# Altium PCB team throttle control draft 2.PcbDoc
Units mil, origin at the board's own origin, x right, y up, seen from the top; angles counter-clockwise.
Board outline 2987.01 x 2349.61 mil, 2 copper layers (Top, Bottom); 15 components, 19 nets, 113 pads, 0 vias.
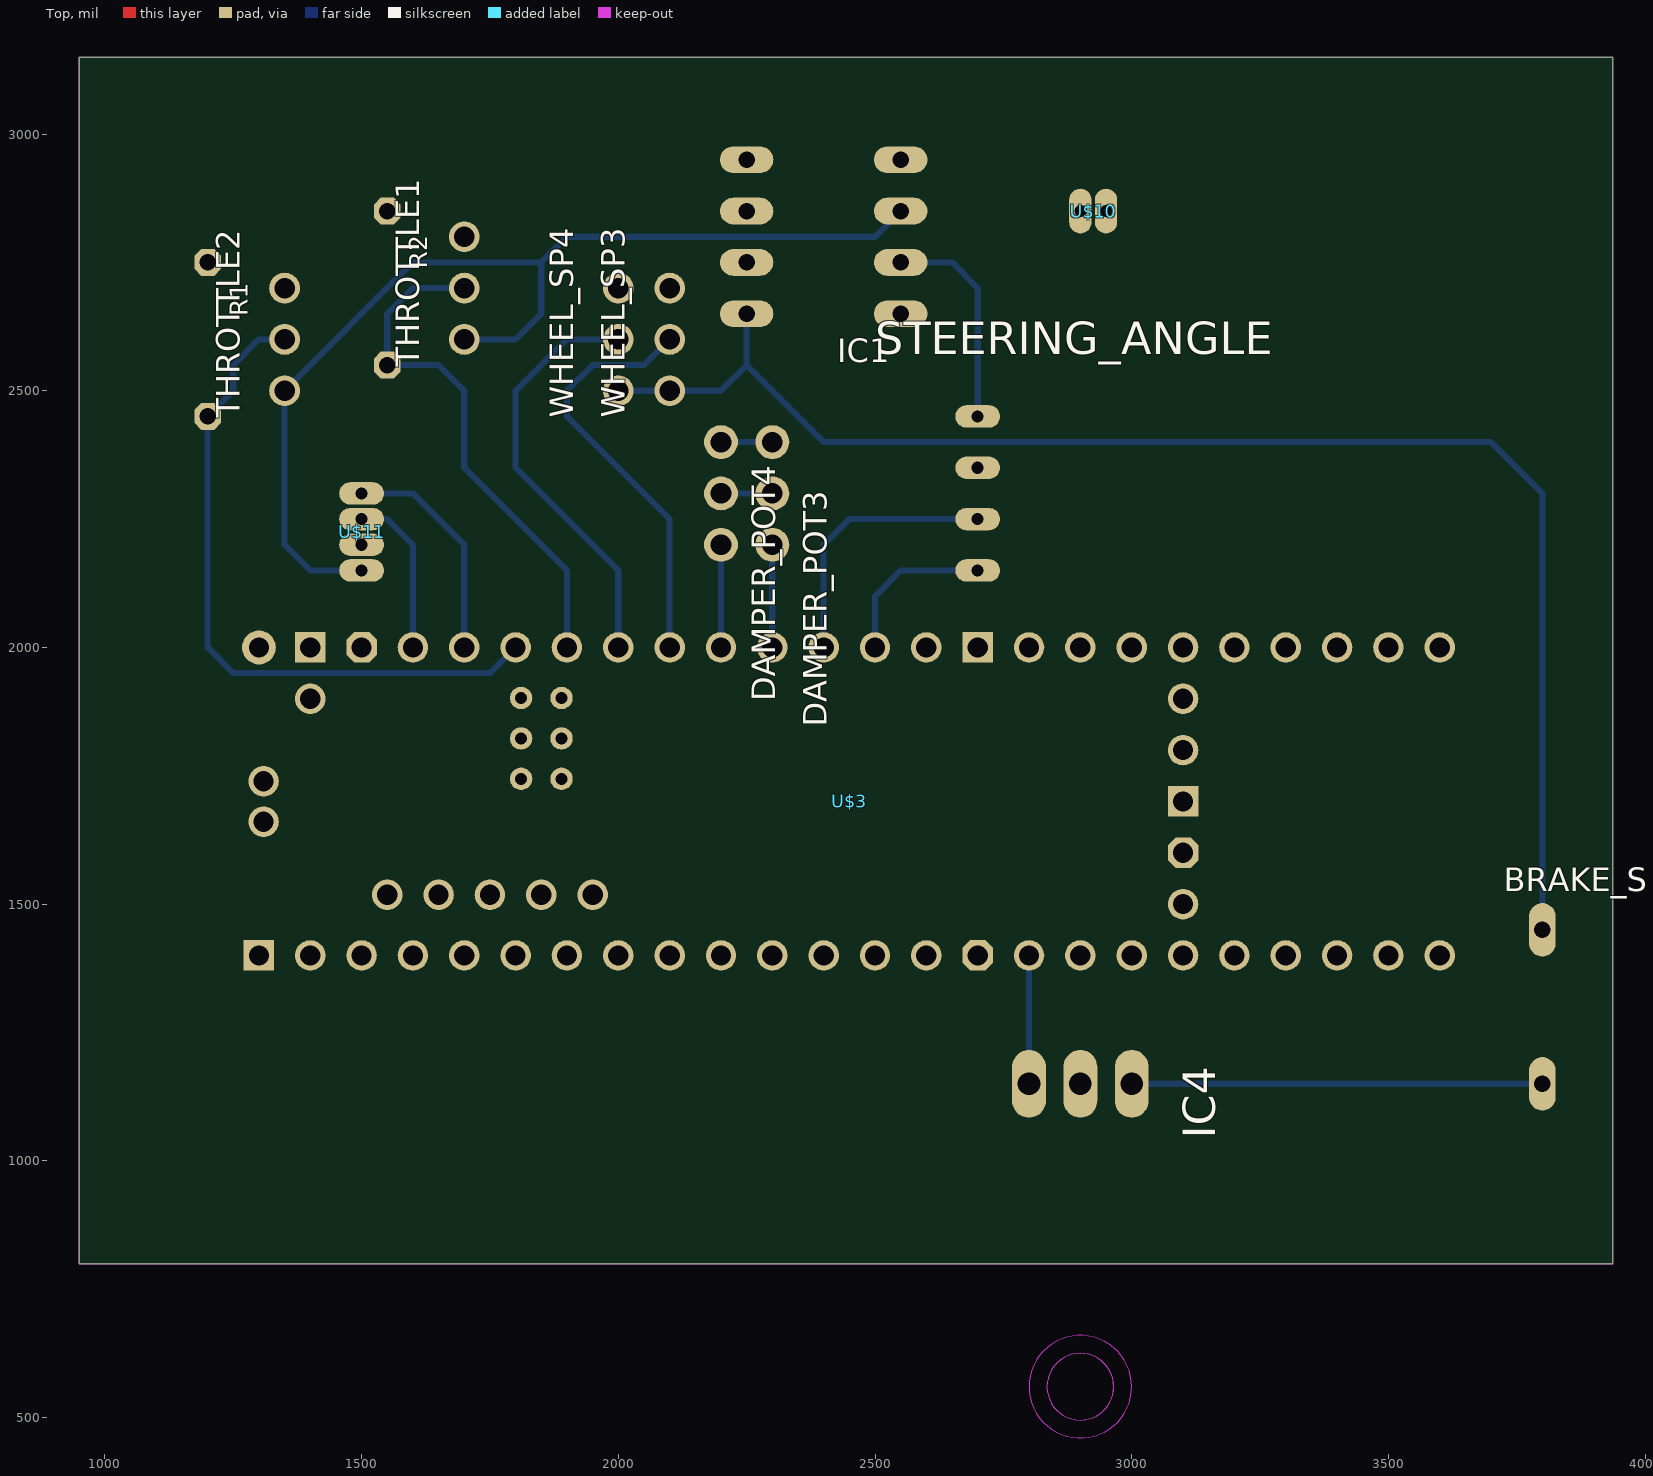
[diagram p0: Top view]
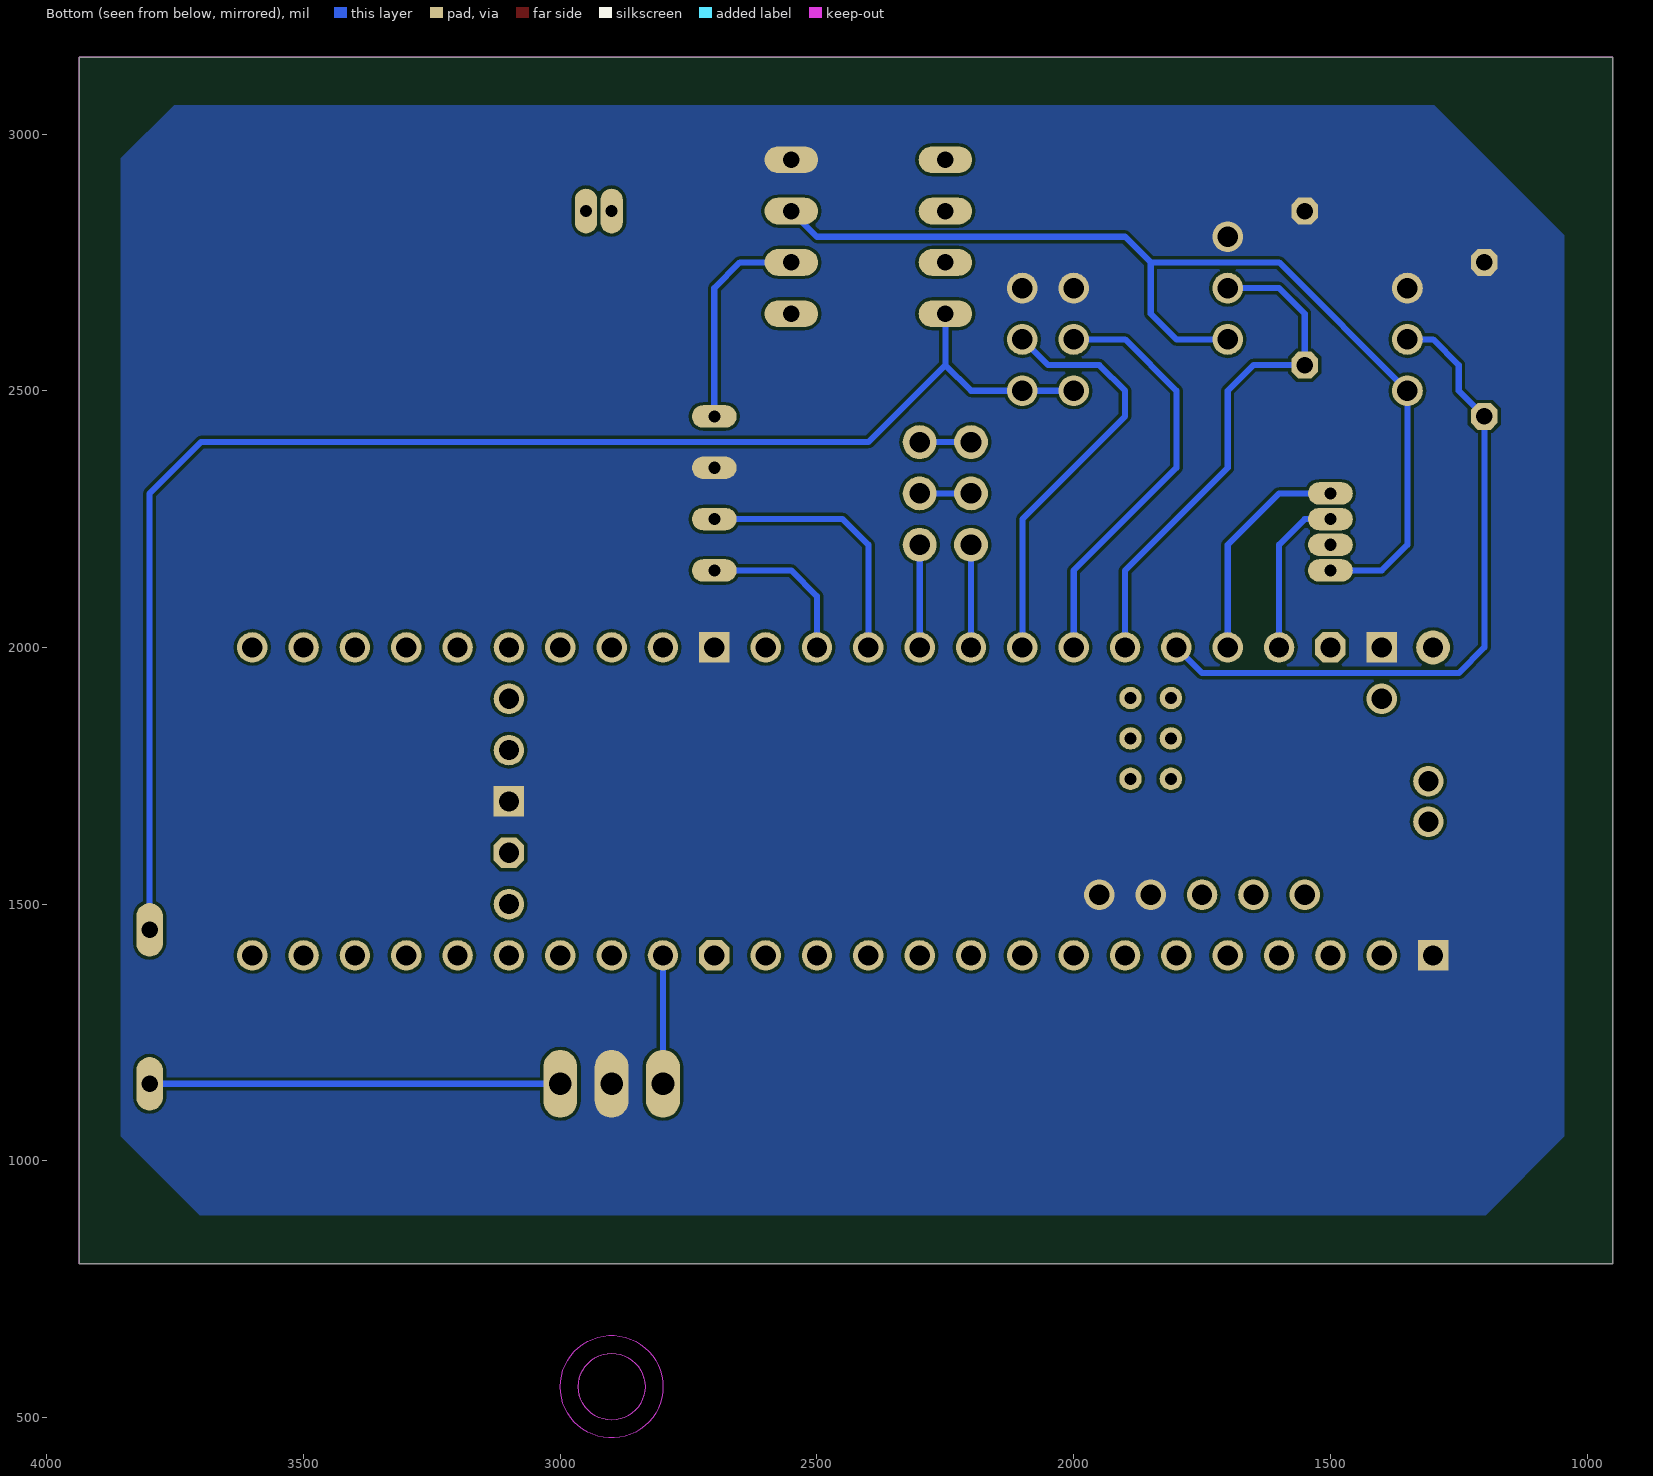
[diagram p1: Bottom view, seen from below]

## Layer stack, top to bottom
Top Solder: solder mask 0.4, Solder Resist, Dk 3.5
Top: signal copper 1.378
Dielectric 1: dielectric 12.6, FR-4, Dk 4.8
Bottom: signal copper 1.378
Bottom Solder: solder mask 0.4, Solder Resist, Dk 3.5

## Board outline
950,3149.61 950,800 3937.01,800 3937.01,3149.61
cut-out: 2900,495 ccw(c2900,560) 2965,560 ccw(c2900,560) 2900,625 ccw(c2900,560) 2835,560 ccw(c2900,560)

## Design rules (kind name [scope] priority, off if disabled: settings)
BoardOutlineClearance mdCopperDimension [All] p1: gap=10 ignorepadtopadclearanceinfootprint=FALSE except(0: Arc-SplitContinuation Track-SplitContinuation SMDPad-SplitContinuation THPad-SplitContinuation Via-SplitContinuation Fill-SplitContinuation Poly-SplitContinuation Region-SplitContinuation Text-SplitContinuation; 40: Poly-OutlineEdge Poly-CavityEdge Poly-CutoutEdge Poly-SplitBarrior)
Clearance "Clearance (Same Net)" [All] p1: gap=6 ignorepadtopadclearanceinfootprint=FALSE
Clearance [All] p2: gap=6 ignorepadtopadclearanceinfootprint=FALSE
HoleSize [All] p1: absolutevalues=TRUE maxlimit=100000 minlimit=13.78 maxpercent=80.000 minpercent=20.000
HoleToHoleClearance mdDrill [All] p1: gap=6 allowstackedmicrovias=TRUE
MinimumSolderMaskSliver [All] p1 off: minsoldermaskwidth=10
PasteMaskExpansion mlMinCreamFrame [All] p1: expansion=0
PolygonConnect PolygonConnect_For_PolygonThermal_ON_Width120000_Gap100000 [InPolygonClass('PolygonThermal_ON_Width120000_Gap100000') vs Not IsVia] p1: connectstyle=Relief reliefconductorwidth=12 reliefentries=4 polygonreliefangle="90 Angle" airgapwidth=10
PolygonConnect ThermalVias [IsVia] p2: connectstyle=Direct reliefconductorwidth=10 reliefentries=4 polygonreliefangle="90 Angle" airgapwidth=10
PolygonConnect [All] p3: connectstyle=Relief reliefconductorwidth=10 reliefentries=4 polygonreliefangle="90 Angle" airgapwidth=10
RoutingVias [All] p1: holewidth=13.78 width=29.78 viastyle="Through Hole" minholewidth=13.78 minwidth=29.78 maxholewidth=100 maxwidth=100
SolderMaskExpansion mlMinStopFrame [All] p1: expansion=4 istentingtop=FALSE
Width [All] p1: maxlimit=10 minlimit=6 preferedwidth=6
26 further rules are at their usual default settings.

## Classes and differential pairs
polygon class PolygonThermal_ON_Width120000_Gap100000: Polygon_1_Net_GND

## Components (designator, comment, footprint, x,y, rotation, side; value= is the part's Value field where it differs from the comment)
BRAKE_SW "" EDG-01 3800,1300 r0 top
DAMPER_POT3 "" 1X03-CLEANBIG 2300,2300 r270 top
DAMPER_POT4 "" 1X03-CLEANBIG 2200,2300 r270 top
IC1 "ICL7663CPA" DIL08 2400,2800 r90 top
IC4 "7805T" TO220H 2900,750 r180 top
R1 "47k" 0204/7 1200,2600 r270 top
R2 "470k" 0204/7 1550,2700 r270 top
STEERING_ANGLE "" ROTARY_ENCODER 2650,2300 r0 top
THROTTLE1 "" 1X03 1700,2700 r90 top
THROTTLE2 "" 1X03 1350,2600 r90 top
U$3 "" TEENSY41 2500,1700 r0 top
U$10 "" CAN_BUS 3100,2950 r180 top
U$11 "" CAN_TEN 1550,2050 r90 top
WHEEL_SP3 "" 1X03 2100,2600 r90 top
WHEEL_SP4 "" 1X03 2000,2600 r90 top

## Footprints (in the part's own frame and the unit in brackets; to place one, negate y for a bottom-side part, rotate by r counter-clockwise, add the part's x,y. Pads: shape width x height; smd on the part's side, far side on the other; paste and mask are expansions set on the pad)
1X03 [mil] "1X03"
  round 60 hole 40: 1(-100,0) 2(0,0) 3(100,0)
1X03-CLEANBIG [mil] "1X03-CLEANBIG"
  round 66 hole 40: 1(-100,0) 2(0,0) 3(100,0)
0204/7 [mil] "0204/7"
  oct 52x52 / inner round 48.04 / far side oct 52x52 hole 32: 1(-150,0) 2(150,0)
CAN_BUS [mil] "CAN_BUS"
  oval 43.62x87.24 hole 23.62: P$2(150,100) P$3(200,100)
CAN_TEN [mil] "CAN_TEN"
  oval 43.62x87.24 hole 23.62: P$1(100,50) P$2(150,50) P$3(200,50) P$4(250,50)
DIL08 [mil] "DIL08"
  oval 52x104 hole 32: 1(-150,-150) 2(-50,-150) 3(50,-150) 4(150,-150) 5(150,150) 6(50,150) 7(-50,150) 8(-150,150)
EDG-01 [mil] "EDG-01"
  oval 52x104 hole 32: 1(0,-150) 2(0,150)
ROTARY_ENCODER [mil] "ROTARY_ENCODER"
  oval 87.24x43.62 hole 23.62: GND(50,50) PH_A(50,-150) PH_B(50,-50) VCC(50,150)
TEENSY41 [mm] "TEENSY41"
  round 1.508 hole 1: 0-RX1/CS1/CRX2(-27.94,-7.62) 1-TX1/MISO1/CTX2(-25.4,-7.62) 2-OUT2(-22.86,-7.62) 3-LRCLK2(-20.32,-7.62) 4-BCLK2(-17.78,-7.62) 5-IN2(-15.24,-7.62) 6-OUT1D(-12.7,-7.62) 7-RX2/OUT1A(-10.16,-7.62) 8-TX2/IN2(-7.62,-7.62) 9-OUT1C(-5.08,-7.62) 10-CS\MQSR(-2.54,-7.62) 11-MOSI/CTX1(0,-7.62) 12-MISO/MQSL(2.54,-7.62) 13-SCK/LED(2.54,7.62) 14-A0/TX3/SPDIF_OUT(0,7.62) 15-A1/RX3/SPDIF_IN(-2.54,7.62) 16-A2/RX4/SCL1(-5.08,7.62) 17-A3/TX4/SDA1(-7.62,7.62) 18-A4/SDA0(-10.16,7.62) 19-A5/SCL0(-12.7,7.62) 20-A6/TX5/LRCLK1(-15.24,7.62) 21-A7/RX5/BCLK1(-17.78,7.62) 22-A8/CTX1(-20.32,7.62) 23-A9/CRX1/MCLK1(-22.86,7.62) 24-A10/TX6/SCL2(7.62,-7.62) 25-A11/RX6/SDA2(10.16,-7.62) 26-A12/MOSI1(12.7,-7.62) 27-A13/SCK1(15.24,-7.62) 28-RX7(17.78,-7.62) 29-TX7(20.32,-7.62) 30-CRX3(22.86,-7.62) 31-CTX3(25.4,-7.62) 32-OUT1B(27.94,-7.62) 33-MCLK2(27.94,7.62) 34-RX8(25.4,7.62) 35-TX8(22.86,7.62) 36-PWM(20.32,7.62) 37-PWM(17.78,7.62) 38-A14/CS/IN1(15.24,7.62) 39-A15/CS/OUT1A(12.7,7.62) 40-A16/CS1(10.16,7.62) 41-A17/MISO1(7.62,7.62) +5V(-24.13,-4.62) D+(-30.25,-1) D-(-30.25,1) DM(-21.59,-4.62) DP(-19.05,-4.62) GND4(-16.51,-4.62) GND5(-13.97,-4.62) ON/OFF(15.24,5.08) PROGRAM(15.24,2.54) VBAT(15.24,-5.08) VUSB(-27.94,5.08)
  oct 1.508x1.508 / inner round 1.393 / far side oct 1.508x1.508 hole 1: 3V3-1(5.08,-7.62) 3V3-2(15.24,-2.54) 3V3-3(-25.4,7.62)
  round 1.108 hole 0.6: G(-15.51,3.12) LED(-17.51,3.12) R+(-17.51,5.12) R-(-15.51,5.12) T+(-15.51,1.12) T-(-17.51,1.12)
  rect 1.508x1.508 / inner round 1.393 / far side rect 1.508x1.508 hole 1: GND1(-30.48,-7.62) GND2(15.24,0) GND3(5.08,7.62) GND6(-27.94,7.62)
  round 1.676 hole 1: VIN(-30.48,7.62)
TO220H [mil] "TO220H"
  oval 66x132 hole 44: 1(-100,-400) 2(0,-400) 3(100,-400)
  Top keep-out circle w0: c0,190 r100
  Bottom keep-out circle w0: c0,190 r100

## Part data
BRAKE_SW: library part EDG-01, PackageName=EDG-01
DAMPER_POT3 DAMPER_POT4: library part 1X03-CLEANBIG, PackageName=1X03-CLEANBIG
IC1: library part DIL08, PackageName=DIL08
IC4: library part TO220H, PackageName=TO220H
R1 R2: library part 0204/7, PackageName=0204/7
STEERING_ANGLE: library part ROTARY_ENCODER, PackageName=ROTARY_ENCODER
THROTTLE1 THROTTLE2 WHEEL_SP3 WHEEL_SP4: library part 1X03, PackageName=1X03
U$3: library part TEENSY41, PackageName=TEENSY41
U$10: library part CAN_BUS, PackageName=CAN_BUS
U$11: library part CAN_TEN, PackageName=CAN_TEN

## Free pads (board coordinates)
  round 130 hole 130 unplated: MH1(2900,560)

## Nets (pads, with @x,y where several pads share a name; then routed paths per layer and width w, separated by ;. In a path a pad name is that pad's centre, name@x,y a point inside that pad or via, vN(x,y) a via of type N, cw(c..) or ccw(c..) an arc to the next point about the centre after c; other vN are vias at no path point)
3.3V: IC1.3 THROTTLE1.1 THROTTLE2.1 U$11.P$1 | length 2086.4
  Bottom w12: U$11.P$1 1400,2150 1350,2200 THROTTLE2.1 1600,2750 1850,2750 ; THROTTLE1.1 1800,2600 1850,2650 1850,2750 ; IC1.3 2500,2800 1900,2800 1850,2750
5V: IC1.2 STEERING_ANGLE.VCC | length 420.7
  Bottom w12: IC1.2 2650,2750 2700,2700 STEERING_ANGLE.VCC
12V: BRAKE_SW.2 IC1.8 WHEEL_SP3.1 WHEEL_SP4.1 | length 2874.3
  Bottom w12: WHEEL_SP4.1 WHEEL_SP3.1 2200,2500 2250,2550 ; IC1.8 2250,2550 ; BRAKE_SW.2 3800,2300 3700,2400 2400,2400 2250,2550
A2_2: DAMPER_POT3.3 U$3.16-A2/RX4/SCL1 | length 200
  Bottom w12: U$3.16-A2/RX4/SCL1 DAMPER_POT3.3
A3_2: DAMPER_POT4.3 U$3.17-A3/TX4/SDA1 | length 200
  Bottom w12: U$3.17-A3/TX4/SDA1 DAMPER_POT4.3
ACC_DATA_OUT_1: R2.2 THROTTLE1.2 U$3.20-A6/TX5/LRCLK1 | length 1024.3
  Bottom w12: THROTTLE1.2 1600,2700 1550,2650 R2.2 1650,2550 1700,2500 1700,2350 1900,2150 U$3.20-A6/TX5/LRCLK1
ACC_DATA_OUT_2: R1.2 THROTTLE2.2 U$3.21-A7/RX5/BCLK1 | length 1332.8
  Bottom w12: THROTTLE2.2 1300,2600 1250,2550 1250,2500 R1.2 1200,2000 1250,1950 1750,1950 U$3.21-A7/RX5/BCLK1
BL_GND: DAMPER_POT3.2 DAMPER_POT4.2 | length 100
  Bottom w12: DAMPER_POT4.2 DAMPER_POT3.2
BR_SW: IC4.3 U$3.24-A10/TX6/SCL2 | length 250
  Bottom w12: IC4.3 U$3.24-A10/TX6/SCL2
BR_VCC: DAMPER_POT3.1 DAMPER_POT4.1 | length 100
  Bottom w12: DAMPER_POT4.1 DAMPER_POT3.1
CRX_2: U$3.23-A9/CRX1/MCLK1 U$11.P$3 | length 320.7
  Bottom w12: U$11.P$3 1550,2250 1600,2200 U$3.23-A9/CRX1/MCLK1
CTX_2: U$3.22-A8/CTX1 U$11.P$4 | length 441.4
  Bottom w12: U$11.P$4 1600,2300 1700,2200 U$3.22-A8/CTX1
GND: IC1.4 IC4.2 R1.1 R2.1 STEERING_ANGLE.GND THROTTLE1.3 THROTTLE2.3 U$3.GND1 U$3.GND2 U$3.GND3 U$3.GND4 U$3.GND5 U$3.GND6 WHEEL_SP3.3 WHEEL_SP4.3
GND\: U$11.P$2
N$4: BRAKE_SW.1 IC4.1 | length 800
  Bottom w12: IC4.1 BRAKE_SW.1
T2_DP_1: STEERING_ANGLE.PH_A U$3.14-A0/TX3/SPDIF_OUT | length 320.7
  Bottom w12: U$3.14-A0/TX3/SPDIF_OUT 2500,2100 2550,2150 STEERING_ANGLE.PH_A
T2_DP_2: STEERING_ANGLE.PH_B U$3.15-A1/RX3/SPDIF_IN | length 520.7
  Bottom w12: U$3.15-A1/RX3/SPDIF_IN 2400,2200 2450,2250 STEERING_ANGLE.PH_B
WH_SP3_D: U$3.18-A4/SDA0 WHEEL_SP3.2 | length 824.3
  Bottom w12: U$3.18-A4/SDA0 2100,2250 1900,2450 1900,2500 1950,2550 2050,2550 WHEEL_SP3.2
WH_SP4_D: U$3.19-A5/SCL0 WHEEL_SP4.2 | length 824.3
  Bottom w12: U$3.19-A5/SCL0 2000,2150 1800,2350 1800,2500 1900,2600 WHEEL_SP4.2
pads on no net: IC1.1 IC1.5 IC1.6 IC1.7 U$3.0-RX1/CS1/CRX2 U$3.1-TX1/MISO1/CTX2 U$3.2-OUT2 U$3.3-LRCLK2 U$3.3V3-1 U$3.3V3-2 U$3.3V3-3 U$3.4-BCLK2 U$3.5-IN2 U$3.6-OUT1D U$3.7-RX2/OUT1A U$3.8-TX2/IN2 U$3.9-OUT1C U$3.10-CS\MQSR U$3.11-MOSI/CTX1 U$3.12-MISO/MQSL U$3.13-SCK/LED U$3.25-A11/RX6/SDA2 U$3.26-A12/MOSI1 U$3.27-A13/SCK1 U$3.28-RX7 U$3.29-TX7 U$3.30-CRX3 U$3.31-CTX3 U$3.32-OUT1B U$3.33-MCLK2 U$3.34-RX8 U$3.35-TX8 U$3.36-PWM U$3.37-PWM U$3.38-A14/CS/IN1 U$3.39-A15/CS/OUT1A U$3.40-A16/CS1 U$3.41-A17/MISO1 U$3.+5V U$3.D+ U$3.D- U$3.DM U$3.DP U$3.G U$3.LED U$3.ON/OFF U$3.PROGRAM U$3.R+ U$3.R- U$3.T+ U$3.T- U$3.VBAT U$3.VIN U$3.VUSB U$10.P$2 U$10.P$3

## Polygon pours and split planes (outlines as drawn)
GND on Bottom "Polygon_1_Net_GND" (solid, remove dead copper, pour order 0): 1044,2802.49 1044,1047.51 1197.51,894 3702.49,894 3856,1047.51 3856,2952.49 3752.49,3056 1297.51,3056

## Keep-outs
Keep-Out Layer:
  the board outline again, w0

## Silkscreen, mask and mechanical layers (free items; w line width, h text height)
Dimension:
  the board outline again, w0

## Text inside footprints (layer, text, board x,y; h text height)
BRAKE_SW: tDocu "ON" at 3750,1400 h93; tDocu "1" at 3790,1135 h93
U$3: tPlace "POGO" at 1370.78,1653.76 h37.2 r90; tPlace "COIN CEL" at 2910,1483 h37.2; tPlace "3 VOLT" at 2945,1510 h37.2; tPlace "USB" at 1409.89,1655.74 h49.6 r90; tPlace "TEENSY 4.1" at 2200,1700 h77.5